# EAGLE board Board_Com (EAGLE 8.2.1)
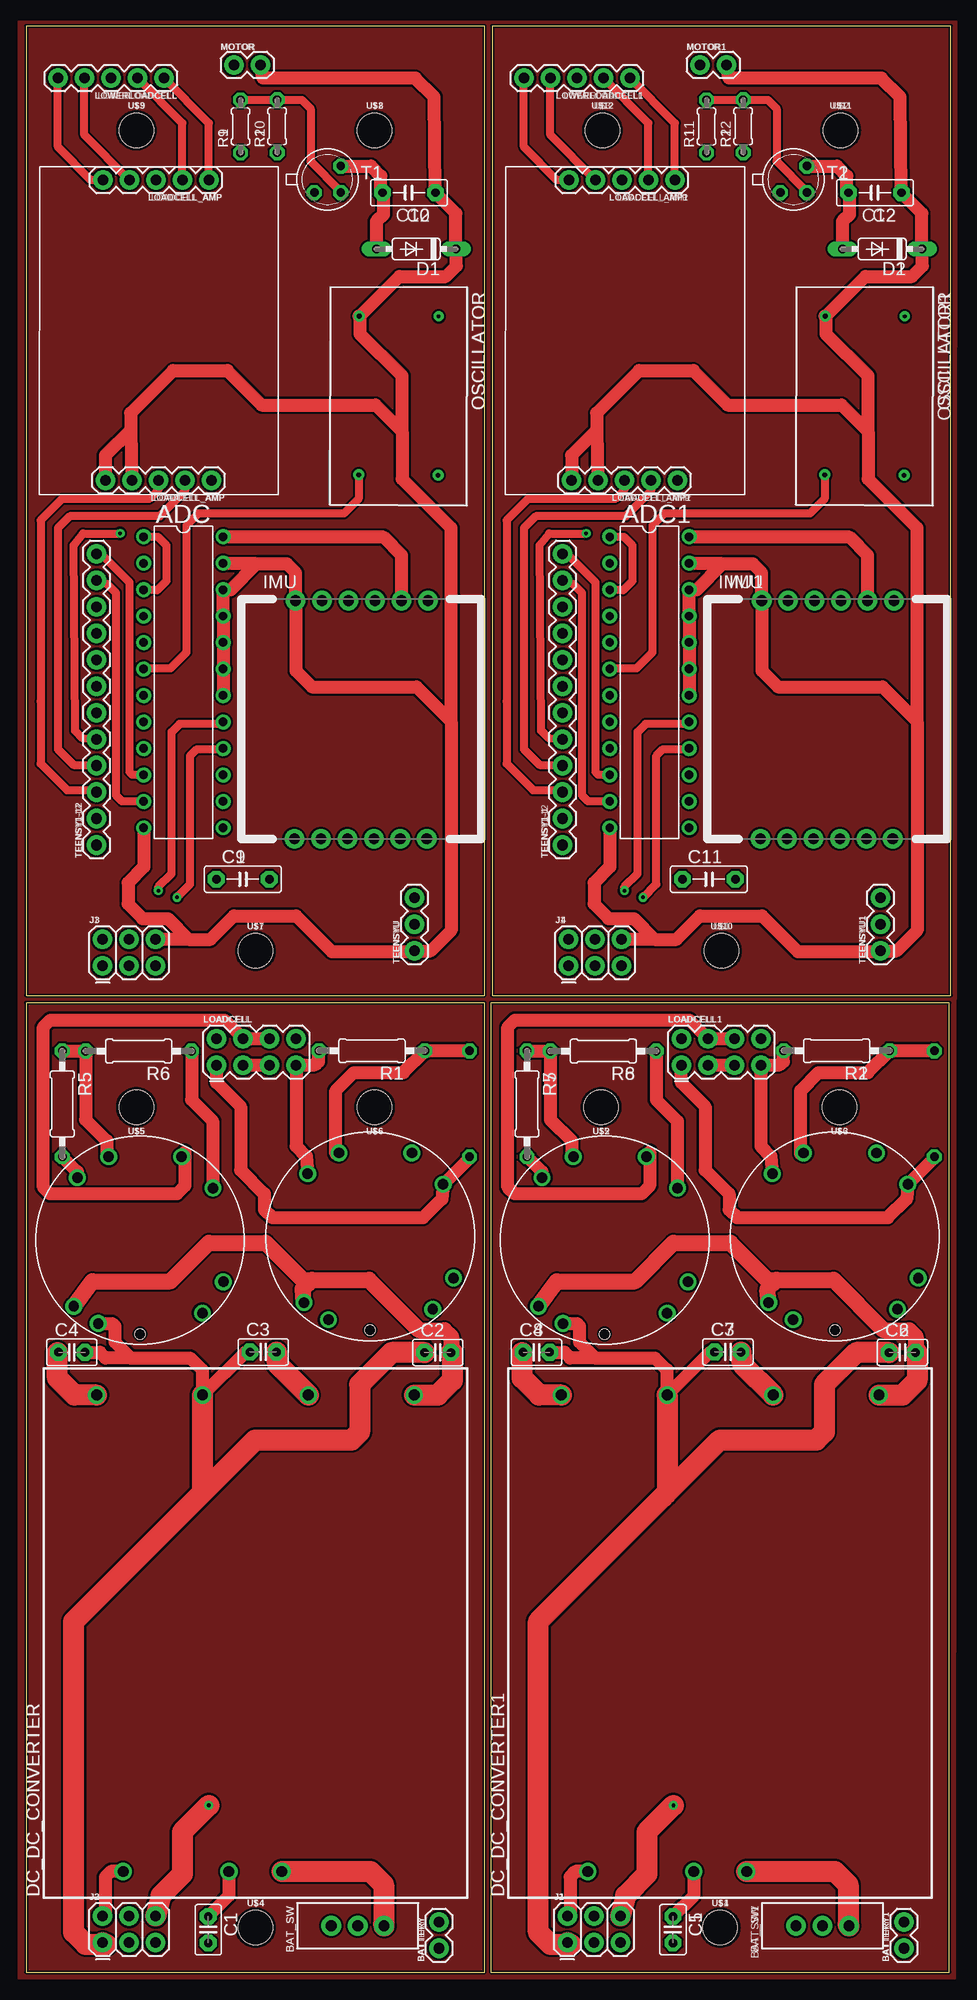
[diagram p0: board, top side]
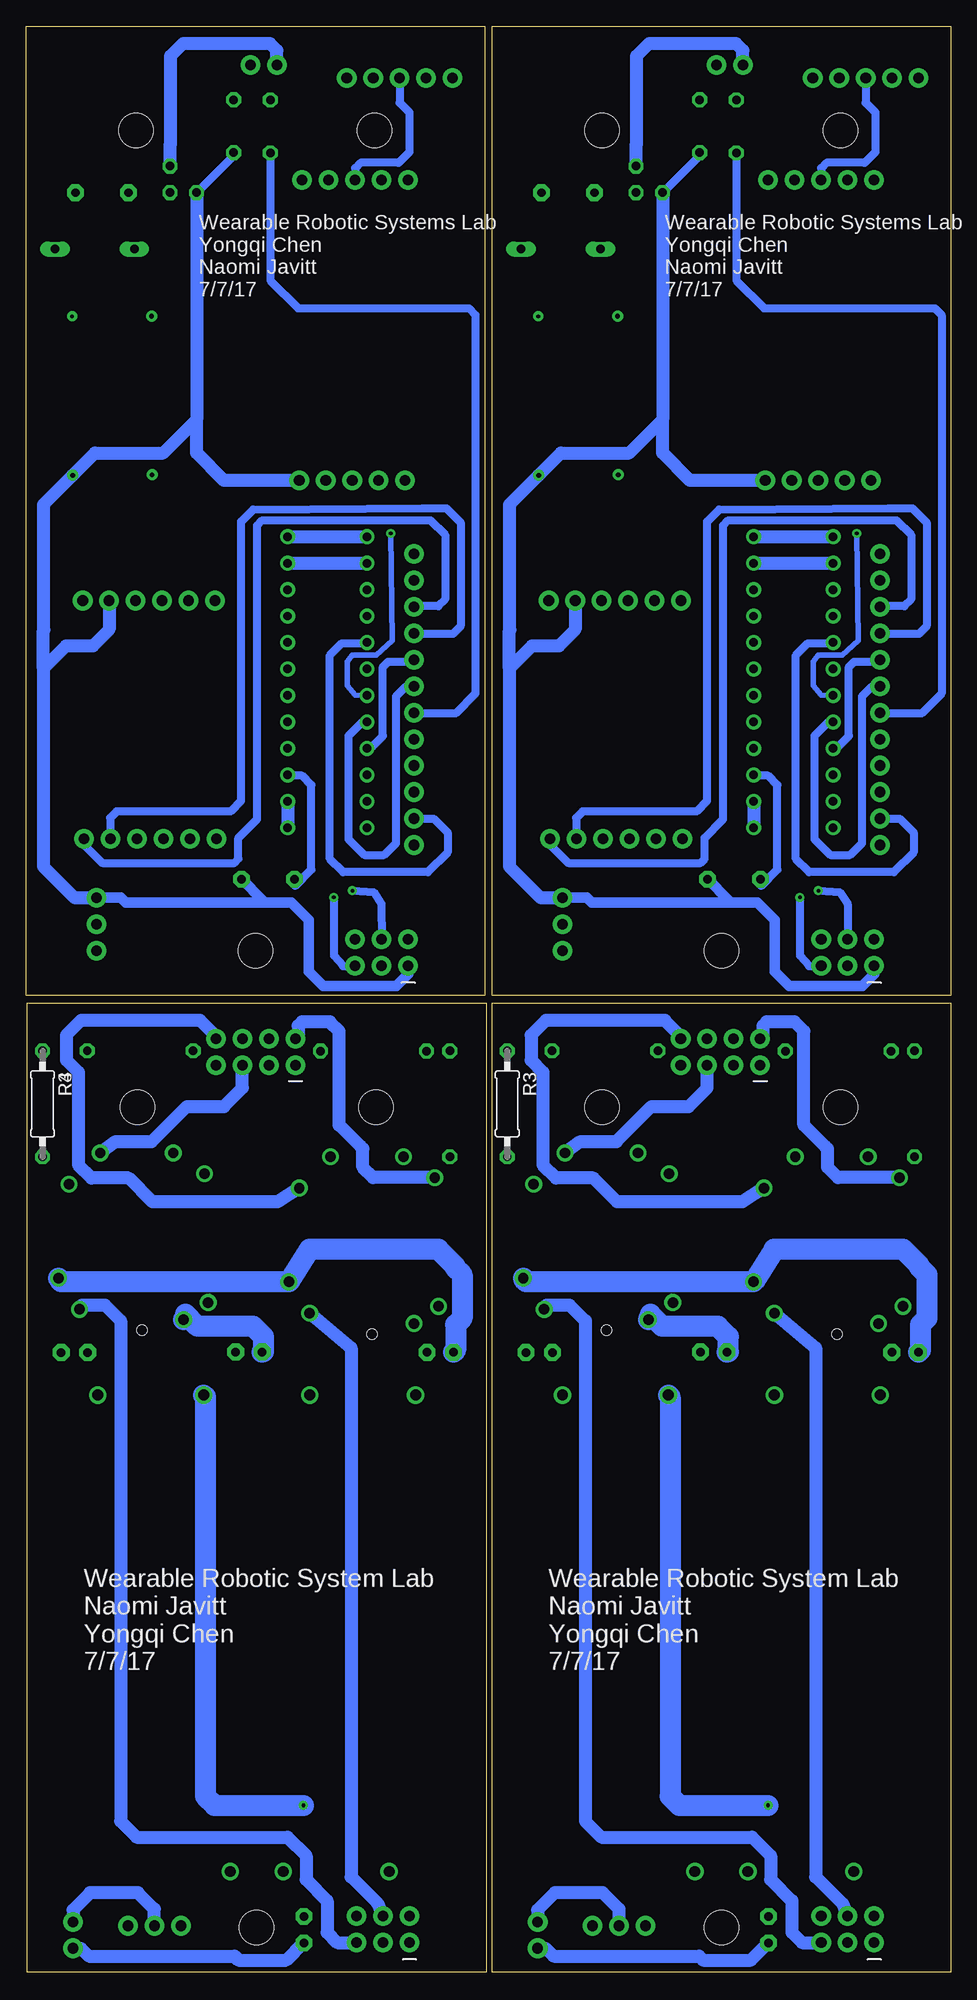
[diagram p1: board, bottom side, seen from below]

Size 88.7 x 186.73 mm. Coordinates in mm from the lower left corner, seen from the top.
Outline: 0,0 44,0 44,93 0,93 0,0
Outline: 44.58,0 88.58,0 88.58,93 44.58,93 44.58,0
Outline: 0,93.73 44,93.73 44,186.73 0,186.73 0,93.73
Outline: 44.7,93.73 88.7,93.73 88.7,186.73 44.7,186.73 44.7,93.73
Copper layers (1*16): Top 0.035mm / dielectric 1.5mm / Bottom 0.035mm
Design rules "SparkFun": minimum track width 8mil, minimum drill 20mil, track to track 8mil, track to pad 8mil, pad to pad 8mil, via to via 8mil, smd to smd 8mil, copper to edge 8mil, drill to drill 8mil, minimum pad ring 12mil, minimum via ring 10mil, stop-mask expansion 4mil, vias tented up to drill 20mil, thermal gap 10mil
Net classes: 2 powers: width 1.778 mm

## Footprints (pad centres in the part's own frame; a part is rotated, then mirrored left to right if it is on the bottom)
DIL24-3 = drill 0.813: 1 -13.97,-3.81; 2 -11.43,-3.81; 3 -8.89,-3.81; 4 -6.35,-3.81; 5 -3.81,-3.81; 6 -1.27,-3.81; 7 1.27,-3.81; 8 3.81,-3.81; 9 6.35,-3.81; 10 8.89,-3.81; 11 11.43,-3.81; 12 13.97,-3.81; 13 13.97,3.81; 14 11.43,3.81; 15 8.89,3.81; 16 6.35,3.81; 17 3.81,3.81; 18 1.27,3.81; 19 -1.27,3.81; 20 -3.81,3.81; 21 -6.35,3.81; 22 -8.89,3.81; 23 -11.43,3.81; 24 -13.97,3.81
SWITCH-SPDT = drill 1.016 pad 1.88: 1 0,2.54; 2 0,0; 3 0,-2.54
1X02 = drill 1.016 pad 1.88: 1 0,0; 2 2.54,0
C2.5-2 = drill 0.813 pad 1.6 octagon: 1 -1.27,0; 2 1.27,0
C5B2.5 = drill 0.813 pad 1.6 octagon: 1 -2.54,0; 2 2.54,0
DIODE_DO35-7 = drill 0.813 long: A 3.81,0; C -3.81,0
DC-DCCONVERTER = drill 1.05: 1 -22.86,-12.7; 2 -22.86,-7.62; 3 -22.86,2.54; 4 22.86,5.08; 5 22.86,-5.08; 6 22.86,-15.24; 7 22.86,-25.4
IMU = drill 1.016 pad 1.88: 1 22.86,-17.907; 2 22.86,-15.367; 3 22.86,-12.827; 4 22.86,-10.287; 5 22.86,-7.747; 6 22.86,-5.207; 7 0,-17.78; 8 0,-15.24; 9 0,-12.7; 10 0,-10.16; 11 0,-7.62; 12 0,-5.08
2X3 = drill 1.016 pad 1.88: 1 0,0; 2 0,2.54; 3 2.54,0; 4 2.54,2.54; 5 5.08,0; 6 5.08,2.54
2X4 = drill 1.016 pad 1.88: 1 -3.81,-1.27; 2 -3.81,1.27; 3 -1.27,-1.27; 4 -1.27,1.27; 5 1.27,-1.27; 6 1.27,1.27; 7 3.81,-1.27; 8 3.81,1.27
LOADCELLAMP2 = drill 1.016 pad 1.88: 1 -14.605,-5.08; 2 -14.605,-2.54; 3 -14.605,0; 4 -14.605,2.54; 5 -14.605,5.08; 6 14.213,-4.826; 7 14.213,-2.286; 8 14.213,0.254; 9 14.213,2.794; 10 14.213,5.334
1X05 = drill 1.016 pad 1.88: 1 0,0; 2 2.54,0; 3 5.08,0; 4 7.62,0; 5 10.16,0
ECS-100X = drill 0.35: 1 -7.62,3.81 | drill 0.45: 7 7.62,3.81; 8 7.61,-3.81; 14 -7.62,-3.81
0207/10 = drill 0.813 octagon: 1 -5.08,0; 2 5.08,0
0204/5 = drill 0.813 octagon: 1 -2.54,0; 2 2.54,0
TO18 = drill 0.813 octagon: 1 -1.27,-1.27; 2 1.27,-1.27; 3 1.27,1.27
1X12 = drill 1.016 pad 1.88: 1 0,0; 2 2.54,0; 3 5.08,0; 4 7.62,0; 5 10.16,0; 6 12.7,0; 7 15.24,0; 8 17.78,0; 9 20.32,0; 10 22.86,0; 11 25.4,0; 12 27.94,0
1X03 = drill 1.016 pad 1.88: 1 0,0; 2 2.54,0; 3 5.08,0
STAND-OFF = hole 3.302: 0,0
ICA3H = drill 1: 1 8,-4; 2 -6,-6; 3 -8,-3; 4 -8,4; 5 -5,7; 6 4,8; 7 7,6; P$1 6.35,-6.35 | hole 1: 9,0

## Placement (x,y rotation side)
ADC  AD7890-10  [DIL24-3]  15.1,123.76 270 top
ADC1  AD7890-10  [DIL24-3]  59.8,123.76 270 top
BAT_SW  [SWITCH-SPDT]  31.81,4.45 270 top
BAT_SW1  [SWITCH-SPDT]  76.39,4.45 270 top
BATTERY  [1X02]  39.62,2.29 90 top
BATTERY1  [1X02]  84.2,2.29 90 top
C1  [C2.5-2]  17.48,4.08 270 top
C2  [C2.5-2]  39.49,59.46 0 top
C3  [C2.5-2]  22.75,59.51 0 top
C4  [C2.5-2]  4.38,59.47 0 top
C5  [C2.5-2]  62.05,4.08 270 top
C6  [C2.5-2]  84.06,59.46 0 top
C7  [C2.5-2]  67.32,59.51 0 top
C8  [C2.5-2]  48.96,59.47 0 top
C9  0.1 uf  [C5B2.5]  20.79,104.87 0 top
C10  0.1uf  [C5B2.5]  36.73,170.74 180 top
C11  0.1 uf  [C5B2.5]  65.49,104.87 0 top
C12  0.1uf  [C5B2.5]  81.43,170.74 180 top
D1  [DIODE_DO35-7]  37.42,165.34 180 top
D2  [DIODE_DO35-7]  82.13,165.34 180 top
DC_DC_CONVERTER  [DC-DCCONVERTER]  11.84,32.51 90 top
DC_DC_CONVERTER1  [DC-DCCONVERTER]  56.42,32.51 90 top
IMU  TSS-EM  [IMU]  20.66,108.74 90 top
IMU1  TSS-EM  [IMU]  65.36,108.74 90 top
J1  FEMALE 2x3  [2X3]  51.92,2.83 0 top
J2  FEMALE 2x3  [2X3]  7.35,2.83 0 top
J3  FEMALE 2x3  [2X3]  7.35,96.55 0 top
J4  FEMALE 2x3  [2X3]  52.05,96.55 0 top
LOADCELL  [2X4]  22.1,88.3 0 top
LOADCELL1  [2X4]  66.67,88.3 0 top
LOADCELL_AMP  HX711  [LOADCELLAMP2]  12.71,157.74 90 top
LOADCELL_AMP1  HX711  [LOADCELLAMP2]  57.42,157.74 90 top
LOWERLOADCELL  [1X05]  13.24,181.73 180 top
LOWERLOADCELL1  [1X05]  57.94,181.73 180 top
MOTOR  [1X02]  19.94,183 0 top
MOTOR1  [1X02]  64.64,183 0 top
OSCILLATOR  CLOCK-ECS-100X  [ECS-100X]  35.74,151.26 269.8 top
OSCILLATOR1  CLOCK-ECS-100X  [ECS-100X]  80.45,151.26 269.8 top
R1  350ohm  [0207/10]  33.18,88.41 180 top
R2  350ohm  [0207/10]  77.75,88.41 180 top
R3  350ohm  [0207/10]  42.55,83.31 270 bottom
R4  350ohm  [0207/10]  87.12,83.31 270 bottom
R5  350hm  [0207/10]  3.48,83.31 270 top
R6  350hm  [0207/10]  10.8,88.38 180 top
R7  350hm  [0207/10]  48.05,83.31 270 top
R8  350hm  [0207/10]  55.37,88.38 180 top
R9  1kohm  [0204/5]  20.57,177.09 90 top
R10  10kohm  [0204/5]  24.09,177.12 90 top
R11  1kohm  [0204/5]  65.28,177.09 90 top
R12  10kohm  [0204/5]  68.79,177.12 90 top
T1  2N2222  [TO18]  28.92,172.02 0 top
T2  2N2222  [TO18]  73.62,172.02 0 top
TEENSY1-1  [1X12]  51.47,108.15 90 top
TEENSY1-12  [1X12]  6.77,108.15 90 top
TEENSYU  [1X03]  37.25,97.99 90 top
TEENSYU1  [1X03]  81.95,97.99 90 top
U$1  [STAND-OFF]  66.59,4.26 0 top
U$2  [STAND-OFF]  55.16,83 180 top
U$3  [STAND-OFF]  78.02,83 180 top
U$4  [STAND-OFF]  22.01,4.26 0 top
U$5  [STAND-OFF]  10.58,83 180 top
U$6  [STAND-OFF]  33.44,83 180 top
U$7  [STAND-OFF]  22.01,97.99 0 top
U$8  [STAND-OFF]  33.44,176.73 0 top
U$9  [STAND-OFF]  10.58,176.73 0 top
U$10  [STAND-OFF]  66.71,97.99 0 top
U$11  [STAND-OFF]  78.14,176.73 0 top
U$12  [STAND-OFF]  55.28,176.73 0 top
UPP_LC_AMP1  ICA3H  [ICA3H]  33.01,70.6 270 top
UPP_LC_AMP2  ICA3H  [ICA3H]  10.92,70.23 270 top
UPP_LC_AMP3  ICA3H  [ICA3H]  77.59,70.6 270 top
UPP_LC_AMP4  ICA3H  [ICA3H]  55.5,70.23 270 top

## Library data of the parts
ADC ADC1 DC_DC_CONVERTER DC_DC_CONVERTER1 IMU IMU1 LOADCELL_AMP LOADCELL_AMP1 OSCILLATOR OSCILLATOR1 UPP_LC_AMP1-UPP_LC_AMP4 = Smartcrutches
BAT_SW BAT_SW1 = SparkFun-Electromechanical; PROD_ID: SWCH-08261
BATTERY BATTERY1 LOADCELL LOADCELL1 LOWERLOADCELL LOWERLOADCELL1 MOTOR MOTOR1 TEENSY1-1 TEENSY1-12 TEENSYU TEENSYU1 = SparkFun-Connectors
C1-C12 = capacitor-wima
D1 D2 = eagle-ltspice; SPICEMODEL: diode; SPICEPREFIX: D
J1-J4 = SparkFun-Connectors; PROD_ID: CONN-11566
R1-R8 = eagle-ltspice; SPICEMODEL: NONE; SPICEPREFIX: R
R9-R12 = resistor
T1 T2 = transistor
U$1-U$12 = SparkFun-Hardware

## Nets
5V: C3.2 DC_DC_CONVERTER.6 J2.6
5V1: C7.2 DC_DC_CONVERTER1.6 J1.6
5V2: ADC.2 ADC.12 ADC.18 ADC.19 ADC.20 ADC.21 ADC.22 ADC.23 C10.1 D1.C IMU.6 J3.6 LOADCELL_AMP.4 LOADCELL_AMP.5 MOTOR.2 OSCILLATOR.14 TEENSYU.1
5V3: ADC1.2 ADC1.12 ADC1.18 ADC1.19 ADC1.20 ADC1.21 ADC1.22 ADC1.23 C12.1 D2.C IMU1.6 J4.6 LOADCELL_AMP1.4 LOADCELL_AMP1.5 MOTOR1.2 OSCILLATOR1.14 TEENSYU1.1
+15V: C2.2 DC_DC_CONVERTER.7 UPP_LC_AMP1.P$1 UPP_LC_AMP2.P$1
+15V1: C6.2 DC_DC_CONVERTER1.7 UPP_LC_AMP3.P$1 UPP_LC_AMP4.P$1
+EX1: LOADCELL.7 R1.2 UPP_LC_AMP1.2
+EX2: LOADCELL.2 R5.2 UPP_LC_AMP2.2
+EX3: LOADCELL1.7 R2.2 UPP_LC_AMP3.2
+EX4: LOADCELL1.2 R7.2 UPP_LC_AMP4.2
+SIG1: R1.1 R3.1 UPP_LC_AMP1.3
+SIG2: R5.1 R6.2 UPP_LC_AMP2.3
+SIG3: R2.1 R4.1 UPP_LC_AMP3.3
+SIG4: R7.1 R8.2 UPP_LC_AMP4.3
-15V: C4.1 DC_DC_CONVERTER.4 UPP_LC_AMP1.6 UPP_LC_AMP2.6
-15V1: C8.1 DC_DC_CONVERTER1.4 UPP_LC_AMP3.6 UPP_LC_AMP4.6
-EX1: LOADCELL.1 R3.2 UPP_LC_AMP1.5
-EX2: LOADCELL.8 R6.1 UPP_LC_AMP2.5
-EX3: LOADCELL1.1 R4.2 UPP_LC_AMP3.5
-EX4: LOADCELL1.8 R8.1 UPP_LC_AMP4.5
-SIG1: LOADCELL.3 LOADCELL.5 UPP_LC_AMP1.4
-SIG2: LOADCELL.4 LOADCELL.6 UPP_LC_AMP2.4
-SIG3: LOADCELL1.3 LOADCELL1.5 UPP_LC_AMP3.4
-SIG4: LOADCELL1.4 LOADCELL1.6 UPP_LC_AMP4.4
ADC-CH1: ADC.16 J3.5
ADC-CH2: ADC.17 J3.4
ADC-CH3: ADC1.16 J4.5
ADC-CH4: ADC1.17 J4.4
ADC-CLK: ADC.6 OSCILLATOR.8
ADC-CLK1: ADC1.6 OSCILLATOR1.8
ADC-CON: ADC.5 TEENSY1-12.2
ADC-CON1: ADC1.5 TEENSY1-1.2
ADC-DIN: ADC.11 TEENSY1-12.11
ADC-DIN1: ADC1.11 TEENSY1-1.11
ADC-DOUT: ADC.10 TEENSY1-12.12
ADC-DOUT1: ADC1.10 TEENSY1-1.12
ADC-RFS: ADC.9 TEENSY1-12.8
ADC-RFS1: ADC1.9 TEENSY1-1.8
ADC-SCLK: ADC.7 TEENSY1-12.5
ADC-SCLK1: ADC1.7 TEENSY1-1.5
ADC-TFS: ADC.8 TEENSY1-12.7
ADC-TFS1: ADC1.8 TEENSY1-1.7
AMP-A+: LOADCELL_AMP.7 LOWERLOADCELL.2
AMP-A+1: LOADCELL_AMP1.7 LOWERLOADCELL1.2
AMP-A-: LOADCELL_AMP.8 LOWERLOADCELL.3
AMP-A-1: LOADCELL_AMP1.8 LOWERLOADCELL1.3
AMP-CLK: LOADCELL_AMP.2 TEENSY1-12.4
AMP-CLK1: LOADCELL_AMP1.2 TEENSY1-1.4
AMP-DAT: LOADCELL_AMP.3 TEENSY1-12.3
AMP-DAT1: LOADCELL_AMP1.3 TEENSY1-1.3
AMP-E+: LOADCELL_AMP.10 LOWERLOADCELL.5
AMP-E+1: LOADCELL_AMP1.10 LOWERLOADCELL1.5
AMP-E-: LOADCELL_AMP.9 LOWERLOADCELL.4
AMP-E-1: LOADCELL_AMP1.9 LOWERLOADCELL1.4
AMP-SD: LOADCELL_AMP.6 LOWERLOADCELL.1
AMP-SD1: LOADCELL_AMP1.6 LOWERLOADCELL1.1
CH1: J2.5 UPP_LC_AMP1.7
CH2: J2.4 UPP_LC_AMP2.7
CH3: J1.5 UPP_LC_AMP3.7
CH4: J1.4 UPP_LC_AMP4.7
DC-CTRL: DC_DC_CONVERTER.3 J2.2
DC-CTRL1: DC_DC_CONVERTER1.3 J1.2
DC-CTRL2: J3.2
DC-CTRL3: J4.2
GND: C2.1 C3.1 C4.2 DC_DC_CONVERTER.5 J2.1 UPP_LC_AMP1.1 UPP_LC_AMP2.1
GND1: C6.1 C7.1 C8.2 DC_DC_CONVERTER1.5 J1.1 UPP_LC_AMP3.1 UPP_LC_AMP4.1
GND2 [powers]: ADC.1 ADC.3 ADC.24 C9.2 IMU.2 J3.1 LOADCELL_AMP.1 OSCILLATOR.7 R10.1 T1.1 TEENSYU.3
GND3 [powers]: ADC1.1 ADC1.3 ADC1.24 C11.2 IMU1.2 J4.1 LOADCELL_AMP1.1 OSCILLATOR1.7 R12.1 T2.1 TEENSYU1.3
IMU-RX: IMU.7 TEENSY1-12.10
IMU-RX1: IMU1.7 TEENSY1-1.10
IMU-TX: IMU.8 TEENSY1-12.9
IMU-TX1: IMU1.8 TEENSY1-1.9
MOTOR: R9.1 TEENSY1-12.6
MOTOR1: R11.1 TEENSY1-1.6
N$1: BATTERY.1
N$2: C1.1 DC_DC_CONVERTER.2
N$3: BAT_SW.1 DC_DC_CONVERTER.1
N$4: C5.1 DC_DC_CONVERTER1.2
N$5: BAT_SW.2 BATTERY.2
N$6: BAT_SW1.1 DC_DC_CONVERTER1.1
N$7: BATTERY1.1
N$8: BAT_SW1.2 BATTERY1.2
N$9: ADC.13 ADC.14
N$10: ADC.15 C9.1
N$11: C10.2 D1.A MOTOR.1 T1.3
N$12: R9.2 R10.2 T1.2
N$13: ADC1.13 ADC1.14
N$14: ADC1.15 C11.1
N$15: C12.2 D2.A MOTOR1.1 T2.3
N$16: R11.2 R12.2 T2.2

## Tracks (layer width: path | path; a pad name or v marks a point on that pad's centre or on a via)
5V  (via drill 0.35)
  Top 2.032: DC_DC_CONVERTER.6 24.14,58.31 C3.2 | v17.53,16 14.99,13.46 14.99,9.4 12.94,7.35 J2.6
  Bottom 2.032: DC_DC_CONVERTER.6 26.92,55.21 26.92,16.89 26.04,16 v17.53,16
5V1  (via drill 0.35)
  Top 2.032: DC_DC_CONVERTER1.6 68.72,58.31 C7.2 | v62.1,16 59.56,13.46 59.56,9.4 57.51,7.35 J1.6
  Bottom 2.032: DC_DC_CONVERTER1.6 71.5,55.21 71.5,16.89 70.61,16 v62.1,16
5V2
  Top 1.27: ADC.18 ADC.19 ADC.20 ADC.21 ADC.22 19.62,132.65 22.1,135.13 | ADC.12 11.3,106.43 11.3,106.05 9.78,104.52 9.78,102.49 11.18,101.09 13.62,101.09 15.62,99.09 | 12.57,99.24 J3.6 15.62,99.09 | MOTOR.2 22.74,181.74 37.34,181.74 39.14,179.94 C10.1 41.23,168.77 D1.C 41.27,165.3 41.27,163.7 40.26,162.69 35.81,162.69 32.02,158.89 | 32.02,158.89 OSCILLATOR.14 | 15.62,99.09 17.69,99.09 19.94,101.35 25.91,101.35 29.34,97.92 37.18,97.92 TEENSYU.1 38.8,97.99 40.77,99.95 40.77,120.02 | 40.77,120.02 40.77,138.56 36.07,143.26 36.07,147.83 | 36.07,147.83 36.07,153.16 32.05,157.18 32.05,158.86 32.02,158.89 | 10.03,147.96 10.03,149.61 14.1,153.67 19.3,153.67 22.61,150.37 33.53,150.37 36.07,147.83 | 10.03,147.96 7.62,145.54 7.62,143.15 LOADCELL_AMP.5 | 10.03,147.96 10.16,143.28 LOADCELL_AMP.4 | 22.1,135.13 25.02,135.13 25.87,134.28 IMU.6 25.91,131.55 25.91,124.84 27.43,123.32 37.47,123.32 40.77,120.02 | 22.1,135.13 18.97,135.13 ADC.23
  Bottom 1.27: ADC.23 ADC.2
5V3
  Top 1.27: ADC1.18 ADC1.19 ADC1.20 ADC1.21 ADC1.22 64.32,132.65 66.8,135.13 | ADC1.12 56.01,106.43 56.01,106.05 54.48,104.52 54.48,102.49 55.88,101.09 58.33,101.09 60.33,99.09 | 57.28,99.24 J4.6 60.33,99.09 | MOTOR1.2 67.45,181.74 82.04,181.74 83.84,179.94 C12.1 85.94,168.77 D2.C 85.98,165.3 85.98,163.7 84.96,162.69 80.52,162.69 76.72,158.89 | 76.72,158.89 OSCILLATOR1.14 | 60.33,99.09 62.39,99.09 64.64,101.35 70.61,101.35 74.04,97.92 81.88,97.92 TEENSYU1.1 83.51,97.99 85.47,99.95 85.47,120.02 | 85.47,120.02 85.47,138.56 80.77,143.26 80.77,147.83 | 80.77,147.83 80.77,153.16 76.75,157.18 76.75,158.86 76.72,158.89 | 54.74,147.96 54.74,149.61 58.8,153.67 64.01,153.67 67.31,150.37 78.23,150.37 80.77,147.83 | 54.74,147.96 52.32,145.54 52.32,143.15 LOADCELL_AMP1.5 | 54.74,147.96 54.86,143.28 LOADCELL_AMP1.4 | 66.8,135.13 69.72,135.13 70.57,134.28 IMU1.6 70.61,131.55 70.61,124.84 72.14,123.32 82.17,123.32 85.47,120.02 | 66.8,135.13 63.67,135.13 ADC1.23
  Bottom 1.27: ADC1.23 ADC1.2
+15V
  Top 1.524: UPP_LC_AMP2.P$1 6.35,66.29 13.84,66.29 17.53,69.98 22.99,69.98 26.53,66.43 27.43,66.43 | UPP_LC_AMP1.P$1 26.53,65.53 27.43,66.43 | 27.43,66.43 32.88,66.43 37.72,61.59 40.13,61.59 40.77,60.96 40.77,59.58 40.89,59.45
  Top 2.032: DC_DC_CONVERTER.7 39.5,55.37 40.89,56.77 40.89,59.45 C2.2
+15V1
  Top 1.524: UPP_LC_AMP4.P$1 50.93,66.29 58.42,66.29 62.1,69.98 67.56,69.98 71.11,66.43 72.01,66.43 | UPP_LC_AMP3.P$1 71.11,65.53 72.01,66.43 | 72.01,66.43 77.46,66.43 82.3,61.59 84.71,61.59 85.34,60.96 85.34,59.58 85.47,59.45
  Top 2.032: DC_DC_CONVERTER1.7 84.07,55.37 85.47,56.77 85.47,59.45 C6.2
+EX1
  Top 1.27: UPP_LC_AMP1.2 26.88,78.27 25.91,79.25 LOADCELL.7 27.59,87.03 27.69,87.12 27.81,87.12 28.07,87.38 28.07,88.38 R1.2
+EX2
  Top 1.27: UPP_LC_AMP2.2 4.92,76.79 R5.2
  Bottom 1.27: UPP_LC_AMP2.2 10.83,76.23 11.81,77.22 11.81,78.99 12.06,79.25 14.1,81.28 14.1,90.3 14.99,91.19 17.65,91.19 18.03,90.8 18.03,89.82 LOADCELL.2
+EX3
  Top 1.27: UPP_LC_AMP3.2 71.46,78.27 70.48,79.25 LOADCELL1.7 72.17,87.03 72.26,87.12 72.39,87.12 72.64,87.38 72.64,88.38 R2.2
+EX4
  Top 1.27: UPP_LC_AMP4.2 49.5,76.79 R7.2
  Bottom 1.27: UPP_LC_AMP4.2 55.4,76.23 56.39,77.22 56.39,78.99 56.64,79.25 58.67,81.28 58.67,90.3 59.56,91.19 62.23,91.19 62.61,90.8 62.61,89.82 LOADCELL1.2
+SIG1
  Top 1.27: UPP_LC_AMP1.3 29.72,78.51 29.72,84.58 31.44,86.3 36.18,86.3 38.27,88.39 R1.1 42.53,88.41 R3.1
+SIG2
  Top 1.27: R5.1 5.7,88.39 R6.2 5.71,81.79 7.75,79.76 7.75,78.41 UPP_LC_AMP2.3
+SIG3
  Top 1.27: UPP_LC_AMP3.3 74.29,78.51 74.29,84.58 76.02,86.3 80.76,86.3 82.85,88.39 R2.1 87.11,88.41 R4.1
+SIG4
  Top 1.27: R7.1 50.28,88.39 R8.2 50.29,81.79 52.32,79.76 52.32,78.41 UPP_LC_AMP4.3
-15V
  Top 1.27: 3,59.46 C4.1
  Top 2.032: DC_DC_CONVERTER.4 4.63,55.37 3,57 3,59.46
  Bottom 2.032: C4.1 2.92,59.66 2.92,62.1 2.29,62.74 2.29,66.93 2.99,67.63 2.99,67.76 4.57,69.34 16.95,69.34 UPP_LC_AMP2.6 40.77,66.23 UPP_LC_AMP1.6
-15V1
  Top 1.27: 47.58,59.46 C8.1
  Top 2.032: DC_DC_CONVERTER1.4 49.2,55.37 47.58,57 47.58,59.46
  Bottom 2.032: C8.1 47.5,59.66 47.5,62.1 46.86,62.74 46.86,66.93 47.57,67.63 47.57,67.76 49.15,69.34 61.53,69.34 UPP_LC_AMP4.6 85.34,66.23 UPP_LC_AMP3.6
-EX1
  Top 1.27: LOADCELL.1 18.29,85.35 20.57,83.06 20.57,76.96 22.86,74.68 22.86,73.15 23.62,72.39 38.1,72.39 39.88,74.17 UPP_LC_AMP1.5 | UPP_LC_AMP1.5 39.88,75.57 | R3.2 42.55,78.13 UPP_LC_AMP1.5
-EX2
  Top 1.27: UPP_LC_AMP2.5 17.91,75.25 17.91,81.66 15.88,83.69 R6.1
  Bottom 1.27: UPP_LC_AMP2.5 20,73.91 32,73.91 34.29,76.2 37.85,76.2 39.12,77.47 39.12,86.36 40.26,87.5 40.26,89.92 38.83,91.35 38.79,91.31 27.43,91.31 25.91,89.79 LOADCELL.8
-EX3
  Top 1.27: LOADCELL1.1 62.86,85.35 65.15,83.06 65.15,76.96 67.44,74.68 67.44,73.15 68.2,72.39 82.68,72.39 84.46,74.17 UPP_LC_AMP3.5 | UPP_LC_AMP3.5 84.46,75.57 | R4.2 87.12,78.13 UPP_LC_AMP3.5
-EX4
  Top 1.27: UPP_LC_AMP4.5 62.48,75.25 62.48,81.66 60.45,83.69 R8.1
  Bottom 1.27: UPP_LC_AMP4.5 64.58,73.91 76.58,73.91 78.87,76.2 82.42,76.2 83.69,77.47 83.69,86.36 84.84,87.5 84.84,89.92 83.4,91.35 83.37,91.31 72.01,91.31 70.48,89.79 LOADCELL1.8
-SIG1
  Top 1.27: LOADCELL.3 LOADCELL.5
  Bottom 1.27: UPP_LC_AMP1.4 35.53,79.7 32.07,79.7 28.71,83.06 25.15,83.06 23.37,84.84 LOADCELL.5
-SIG2
  Top 1.27: LOADCELL.6 LOADCELL.4 19.05,91.35 2.32,91.35 1.65,90.68 1.65,75.31 2.29,74.68 14.48,74.68 15.24,75.44 15.24,78.67 UPP_LC_AMP2.4
-SIG3
  Top 1.27: LOADCELL1.3 LOADCELL1.5
  Bottom 1.27: UPP_LC_AMP3.4 80.11,79.7 76.65,79.7 73.29,83.06 69.72,83.06 67.94,84.84 LOADCELL1.5
-SIG4
  Top 1.27: LOADCELL1.6 LOADCELL1.4 63.63,91.35 46.9,91.35 46.23,90.68 46.23,75.31 46.86,74.68 59.05,74.68 59.82,75.44 59.82,78.67 UPP_LC_AMP4.4
ADC-CH1  (via drill 0.35)
  Top 0.762: 14.48,103.25 v14.48,103.12 15.75,104.39 15.75,116.71 16.38,117.35 18.84,117.35 ADC.16
  Bottom 0.762: v14.48,103.12 14.48,97.54 13.59,96.52 J3.5
ADC-CH2  (via drill 0.35)
  Top 0.762: 12.7,103.89 v12.7,103.76 12.7,104.14 13.97,105.41 13.97,119 14.73,119.76 18.72,119.76 ADC.17
  Bottom 0.762: v12.7,103.76 10.67,103.63 9.91,102.49 J3.4
ADC-CH3  (via drill 0.35)
  Top 0.762: 59.18,103.25 v59.18,103.12 60.45,104.39 60.45,116.71 61.09,117.35 63.55,117.35 ADC1.16
  Bottom 0.762: v59.18,103.12 59.18,97.54 58.29,96.52 J4.5
ADC-CH4  (via drill 0.35)
  Top 0.762: 57.4,103.89 v57.4,103.76 57.4,104.14 58.67,105.41 58.67,119 59.44,119.76 63.42,119.76 ADC1.17
  Bottom 0.762: v57.4,103.76 55.37,103.63 54.61,102.49 J4.4
ADC-CLK
  Top 0.762: ADC.6 11.35,125.09 13.84,125.09 15.37,126.62 15.37,138.81 16.51,139.95 30.48,139.95 31.91,141.38 OSCILLATOR.8
ADC-CLK1
  Top 0.762: ADC1.6 56.05,125.09 58.55,125.09 60.07,126.62 60.07,138.81 61.21,139.95 75.18,139.95 76.61,141.38 OSCILLATOR1.8
ADC-CON
  Bottom 0.762: TEENSY1-12.2 4.89,110.69 3.56,109.35 3.56,107.44 5.46,105.54 13.59,105.54 14.86,106.81 14.86,126.36 13.72,127.51 11.35,127.51 ADC.5
ADC-CON1
  Bottom 0.762: TEENSY1-1.2 49.6,110.69 48.26,109.35 48.26,107.44 50.16,105.54 58.29,105.54 59.56,106.81 59.56,126.36 58.42,127.51 56.05,127.51 ADC1.5
ADC-DIN
  Top 0.762: ADC.11 9.21,112.33 8.64,112.9 8.64,132.33 7.75,133.22 7.09,133.22 TEENSY1-12.11
ADC-DIN1
  Top 0.762: ADC1.11 53.91,112.33 53.34,112.9 53.34,132.33 52.45,133.22 51.8,133.22 TEENSY1-1.11
ADC-DOUT
  Top 0.762: ADC.10 10.22,114.87 9.91,115.19 9.91,133.35 7.17,136.09 TEENSY1-12.12
ADC-DOUT1
  Top 0.762: ADC1.10 54.93,114.87 54.61,115.19 54.61,133.35 51.87,136.09 TEENSY1-1.12
ADC-RFS
  Bottom 0.762: ADC.9 10.99,117.41 9.78,118.62 9.78,125.22 9.27,125.73 6.97,125.73 TEENSY1-12.8
ADC-RFS1
  Bottom 0.762: ADC1.9 55.69,117.41 54.48,118.62 54.48,125.22 53.98,125.73 51.67,125.73 TEENSY1-1.8
ADC-SCLK  (via drill 0.35)
  Top 0.762: TEENSY1-12.5 5.46,118.36 4.7,119.13 4.57,136.91 5.46,138.05 v9.02,138.05
  Bottom 0.508: v9.02,138.05 8.89,127.76 10.41,126.36 12.7,126.36 13.21,125.73 13.21,123.44 12.45,122.55 ADC.7
ADC-SCLK1  (via drill 0.35)
  Top 0.762: TEENSY1-1.5 50.16,118.36 49.4,119.13 49.28,136.91 50.16,138.05 v53.72,138.05
  Bottom 0.508: v53.72,138.05 53.59,127.76 55.12,126.36 57.4,126.36 57.91,125.73 57.91,123.44 57.15,122.55 ADC1.7
ADC-TFS
  Bottom 0.762: ADC.8 11.75,119.95 13.08,118.62 13.08,108.71 11.56,107.19 9.65,107.19 8.51,108.33 8.51,122.43 7.62,123.32 6.84,123.32 TEENSY1-12.7
ADC-TFS1
  Bottom 0.762: ADC1.8 56.45,119.95 57.79,118.62 57.79,108.71 56.26,107.19 54.36,107.19 53.21,108.33 53.21,122.43 52.32,123.32 51.54,123.32 TEENSY1-1.7
AMP-A+
  Top 0.762: LOADCELL_AMP.7 15,177.43 LOWERLOADCELL.2
AMP-A+1
  Top 0.762: LOADCELL_AMP1.7 59.7,177.43 LOWERLOADCELL1.2
AMP-A-
  Bottom 0.762: LOWERLOADCELL.3 8.16,179.36 7.24,178.44 7.24,174.62 8.25,173.61 11.94,173.61 12.45,173.1 12.45,171.97 LOADCELL_AMP.8
AMP-A-1
  Bottom 0.762: LOWERLOADCELL1.3 52.86,179.36 51.94,178.44 51.94,174.62 52.96,173.61 56.64,173.61 57.15,173.1 57.15,171.97 LOADCELL_AMP1.8
AMP-CLK
  Top 0.762: LOADCELL_AMP.2 15.25,142.13 12.83,139.7 4.19,139.7 3.05,138.56 3.05,117.35 4.57,115.82 6.71,115.82 TEENSY1-12.4
AMP-CLK1
  Top 0.762: LOADCELL_AMP1.2 59.96,142.13 57.53,139.7 48.9,139.7 47.75,138.56 47.75,117.35 49.28,115.82 51.42,115.82 TEENSY1-1.4
AMP-DAT
  Top 0.508: TEENSY1-12.3 6.46,113.54
  Top 0.762: LOADCELL_AMP.3 12.71,142.25 11.81,141.35 3.43,141.35 1.4,139.32 1.4,121.92 1.4,115.95 3.94,113.41 6.58,113.41 TEENSY1-12.3
AMP-DAT1
  Top 0.508: TEENSY1-1.3 51.16,113.54
  Top 0.762: LOADCELL_AMP1.3 57.42,142.25 56.52,141.35 48.13,141.35 46.1,139.32 46.1,121.92 46.1,115.95 48.64,113.41 51.29,113.41 TEENSY1-1.3
AMP-E+
  Top 0.762: LOADCELL_AMP.10 6.22,171.96 3.05,175.13 3.05,181.7 LOWERLOADCELL.5
AMP-E+1
  Top 0.762: LOADCELL_AMP1.10 50.93,171.96 47.75,175.13 47.75,181.7 LOWERLOADCELL1.5
AMP-E-
  Top 0.762: LOADCELL_AMP.9 9.91,171.96 5.59,176.28 5.59,181.7 LOWERLOADCELL.4
AMP-E-1
  Top 0.762: LOADCELL_AMP1.9 50.29,176.28 50.29,181.7 LOWERLOADCELL1.4
AMP-SD
  Top 0.762: LOADCELL_AMP.6 17.54,177.43 LOWERLOADCELL.1
AMP-SD1
  Top 0.762: LOADCELL_AMP1.6 62.24,177.43 LOWERLOADCELL1.1
CH1
  Bottom 1.27: UPP_LC_AMP1.7 38.78,64.01 36.58,64.01 35.05,62.48 35.05,14.48 33.53,12.95 19.05,12.95 17.27,11.18 17.27,8.89 15.24,6.86 15.24,3.81 14.26,2.83 J2.5
CH2
  Bottom 1.27: UPP_LC_AMP2.7 12.95,59.9 12.95,9.14 10.39,6.58 J2.4
CH3
  Bottom 1.27: UPP_LC_AMP3.7 83.36,64.01 81.15,64.01 79.63,62.48 79.63,14.48 78.1,12.95 63.63,12.95 61.85,11.18 61.85,8.89 59.82,6.86 59.82,3.81 58.83,2.83 J1.5
CH4
  Bottom 1.27: UPP_LC_AMP4.7 57.53,59.9 57.53,9.14 54.97,6.58 J1.4
DC-CTRL
  Top 1.27: DC_DC_CONVERTER.3 8.13,9.65 7.62,9.14 7.62,5.6 J2.2
DC-CTRL1
  Top 1.27: DC_DC_CONVERTER1.3 52.7,9.65 52.2,9.14 52.2,5.6 J1.2
GND
  Top 1.27: C4.2 7.08,59.47 7.62,58.93 10.03,58.93 | 10.03,58.93 15.75,58.93 16.89,57.79 16.89,55.4 DC_DC_CONVERTER.5 21.06,59.51 C3.1 | UPP_LC_AMP2.1 8.25,62.23 8.51,61.98 8.51,60.45 10.03,58.93
  Top 2.032: J2.1 7.7,2.67 5.71,2.67 4.57,3.81 4.57,33.66 16.51,45.59 | C2.1 35.08,59.46 32,56.39 32,51.82 31.24,51.05 21.97,51.05 16.51,45.59 | DC_DC_CONVERTER.5 16.92,46.01 16.51,45.59
  Bottom 2.032: C3.1 21.34,59.52 21.34,60.96 22.35,61.98 27.69,61.98 28.82,63.11 UPP_LC_AMP1.1
GND1
  Top 1.27: C8.2 51.66,59.47 52.2,58.93 54.61,58.93 | 54.61,58.93 60.33,58.93 61.47,57.79 61.47,55.4 DC_DC_CONVERTER1.5 65.64,59.51 C7.1 | UPP_LC_AMP4.1 52.83,62.23 53.09,61.98 53.09,60.45 54.61,58.93
  Top 2.032: J1.1 52.27,2.67 50.29,2.67 49.15,3.81 49.15,33.66 61.09,45.59 | C6.1 79.65,59.46 76.58,56.39 76.58,51.82 75.82,51.05 66.55,51.05 61.09,45.59 | DC_DC_CONVERTER1.5 61.5,46.01 61.09,45.59
  Bottom 2.032: C7.1 65.91,59.52 65.91,60.96 66.93,61.98 72.26,61.98 73.39,63.11 UPP_LC_AMP3.1
GND2
  Top 0.762: ADC.1 12.64,137.73 13.46,136.91 13.46,133.48 12.57,132.59 11.35,132.59 ADC.3
  Top 1.27: IMU.2 36.02,135.93 34.29,137.67 18.97,137.67 ADC.24
  Bottom 0.762: R10.1 24.09,174.31 T1.1
  Bottom 1.016: J3.1 7.35,95.78 8.51,94.61 15.49,94.61 16.89,96.01 16.89,100.96 18.54,102.62 21.34,102.62 | 21.34,102.62 34.42,102.62 34.93,103.12 37.19,103.12 TEENSYU.3 | 21.34,102.62 21.34,102.87 C9.2
  Bottom 1.27: TEENSYU.3 39.31,103.07 42.35,106.1 42.35,125.09 | ADC.24 ADC.1 | IMU.2 36.02,128.82 37.59,127.25 40.19,127.25 42.35,125.09 | T1.1 27.65,148.97 | 27.65,148.97 27.65,145.76 25.02,143.13 LOADCELL_AMP.1 | 27.65,148.97 30.86,145.76 37.39,145.76 OSCILLATOR.7 42.35,140.8 42.29,140.75 42.29,128.78 42.35,128.72 42.35,125.09
GND3
  Top 0.762: ADC1.1 57.34,137.73 58.17,136.91 58.17,133.48 57.28,132.59 56.05,132.59 ADC1.3
  Top 1.27: IMU1.2 80.73,135.93 78.99,137.67 63.67,137.67 ADC1.24
  Bottom 0.762: R12.1 68.79,174.31 T2.1
  Bottom 1.016: J4.1 52.05,95.78 53.21,94.61 60.2,94.61 61.59,96.01 61.59,100.96 63.25,102.62 66.04,102.62 | 66.04,102.62 79.12,102.62 79.63,103.12 81.9,103.12 TEENSYU1.3 | 66.04,102.62 66.04,102.87 C11.2
  Bottom 1.27: TEENSYU1.3 84.02,103.07 87.05,106.1 87.05,125.09 | ADC1.24 ADC1.1 | IMU1.2 80.73,128.82 82.3,127.25 84.89,127.25 87.05,125.09 | T2.1 72.35,148.97 | 72.35,148.97 72.35,145.76 69.72,143.13 62.51,143.13 LOADCELL_AMP1.1 | 72.35,148.97 75.56,145.76 82.1,145.76 OSCILLATOR1.7 87.05,140.8 86.99,140.75 86.99,128.78 87.05,128.72 87.05,125.09
IMU-RX
  Bottom 0.762: IMU.7 38.44,108.16 36.7,106.43 24,106.43 23.62,106.81 23.62,108.84 21.84,110.62 21.84,138.81 21.34,139.32 5.21,139.32 3.81,137.92 3.81,131.7 4.44,131.06 6.71,131.06 TEENSY1-12.10
IMU-RX1
  Bottom 0.762: IMU1.7 83.14,108.16 81.41,106.43 68.71,106.43 68.33,106.81 68.33,108.84 66.55,110.62 66.55,138.81 66.04,139.32 49.91,139.32 48.51,137.92 48.51,131.7 49.15,131.06 51.42,131.06 TEENSY1-1.10
IMU-TX
  Bottom 0.762: TEENSY1-12.9 6.7,128.4 3.05,128.4 2.31,129.13 2.31,139.09 3.68,140.46 5.97,140.46 22.23,140.34 23.37,139.19 23.37,112.39 24.38,111.38 35.31,111.38 35.94,110.74 35.94,108.78 IMU.8
IMU-TX1
  Bottom 0.762: TEENSY1-1.9 51.41,128.4 47.75,128.4 47.02,129.13 47.02,139.09 48.39,140.46 50.67,140.46 66.93,140.34 68.07,139.19 68.07,112.39 69.09,111.38 80.01,111.38 80.64,110.74 80.64,108.78 IMU1.8
MOTOR
  Bottom 0.762: TEENSY1-12.6 6.7,120.78 2.79,120.78 0.89,122.68 0.89,159 1.52,159.64 17.91,159.64 20.57,162.31 R9.1
MOTOR1
  Bottom 0.762: TEENSY1-1.6 51.41,120.78 47.5,120.78 45.59,122.68 45.59,159 46.23,159.64 62.61,159.64 65.28,162.31 R11.1
N$1
  Bottom 1.27: BATTERY.1 38.86,2.29 38.1,1.52 24.13,1.52 23.75,1.14 19.18,1.14 17.53,2.79
N$2
  Top 1.27: DC_DC_CONVERTER.2 19.46,7.33 C1.1
N$3
  Top 2.032: DC_DC_CONVERTER.1 33.02,9.65 34.29,8.38 34.29,4.63 BAT_SW.1
N$4
  Top 1.27: DC_DC_CONVERTER1.2 64.04,7.33 C5.1
N$5
  Bottom 1.27: BAT_SW.2 31.81,6.03 33.4,7.62 37.97,7.62 39.62,5.97 BATTERY.2
N$6
  Top 2.032: DC_DC_CONVERTER1.1 77.6,9.65 78.87,8.38 78.87,4.63 BAT_SW1.1
N$7
  Bottom 1.27: BATTERY1.1 83.44,2.29 82.68,1.52 68.71,1.52 68.33,1.14 63.75,1.14 62.1,2.79
N$8
  Bottom 1.27: BAT_SW1.2 76.39,6.03 77.98,7.62 82.55,7.62 84.2,5.97 BATTERY1.2
N$9
  Bottom 1.27: ADC.14 ADC.13
N$10
  Bottom 0.762: C9.1 18.2,104.23 16.64,105.79 16.64,113.92 17.53,114.81 18.84,114.81 ADC.15
N$11
  Top 1.27: T1.3 33.09,173.28 34.04,172.34 34.04,170.89 C10.2 34.29,170.63 34.29,168.66 33.61,167.98 D1.A
  Bottom 1.27: MOTOR.1 19.94,184.4 20.61,185.08 28.92,185.08 30.14,183.86 30.14,175.36 30.19,175.31 T1.3
N$12
  Top 0.762: 30.19,170.85 27.31,173.74 27.31,178.82 26.46,179.66 R10.2 24.06,179.63 R9.2
  Top 1.27: T1.2 30.19,170.85 | 24.16,179.58 R10.2 | 20.6,179.66 R9.2
N$13
  Bottom 1.27: ADC1.14 ADC1.13
N$14
  Bottom 0.762: C11.1 62.9,104.23 61.34,105.79 61.34,113.92 62.23,114.81 63.55,114.81 ADC1.15
N$15
  Top 1.27: T2.3 77.79,173.28 78.74,172.34 78.74,170.89 C12.2 78.99,170.63 78.99,168.66 78.32,167.98 D2.A
  Bottom 1.27: MOTOR1.1 64.64,184.4 65.31,185.08 73.62,185.08 74.84,183.86 74.84,175.36 74.89,175.31 T2.3
N$16
  Top 0.762: 74.89,170.85 72.01,173.74 72.01,178.82 71.17,179.66 R12.2 68.77,179.63 R11.2
  Top 1.27: T2.2 74.89,170.85 | 68.87,179.58 R12.2 | 65.3,179.66 R11.2
S$1
  pour Top: -0.76,-0.64 89.15,-0.64 89.28,187.2 -0.76,187.2

## Text on the board
_tsilk: IMU | IMU
_bsilk: Wearable Robotic Systems Lab / Yongqi Chen / Naomi Javitt / 7/7/17 | Wearable Robotic Systems Lab / Yongqi Chen / Naomi Javitt / 7/7/17 | Wearable Robotic System Lab / Naomi Javitt / Yongqi Chen / 7/7/17 | Wearable Robotic System Lab / Naomi Javitt / Yongqi Chen / 7/7/17
_tNames: MOTOR | MOTOR | LOWERLOADCELL | LOWERLOADCELL | U$3 | U$2 | U$3 | U$2 | R1 | R2 | R1 | R2 | T1 | T1 | LOADCELL_AMP | LOADCELL_AMP | C2 | C2 | D1 | D1 | OSCILLATOR | OSCILLATOR | LOADCELL_AMP | LOADCELL_AMP | ADC | ADC | TEENSY1-12 | TEENSY1-12 | C1 | C1 | J1 | U$1 | J1 | U$1 | TEENSYU | TEENSYU | LOADCELL | LOADCELL | R1 | R1 | R5 | R6 | R5 | R6 | U$5 | U$6 | U$5 | U$6 | C4 | C3 | C2 | C4 | C3 | C2 | DC_DC_CONVERTER | J2 | DC_DC_CONVERTER | J2 | U$4 | BAT_SW | U$4 | BAT_SW | C1 | C1 | BATTERY | BATTERY
_bNames: R3 | R3